# Altium PCB Switch Video con PIC.PCBDOC
Units mm, origin at the board's own origin, x right, y up, seen from the top; angles counter-clockwise.
Board outline 1575.25 x 975.75 mm, 2 copper layers (Top Layer, Bottom Layer); 138 components, 95 nets, 424 pads, 8 vias.
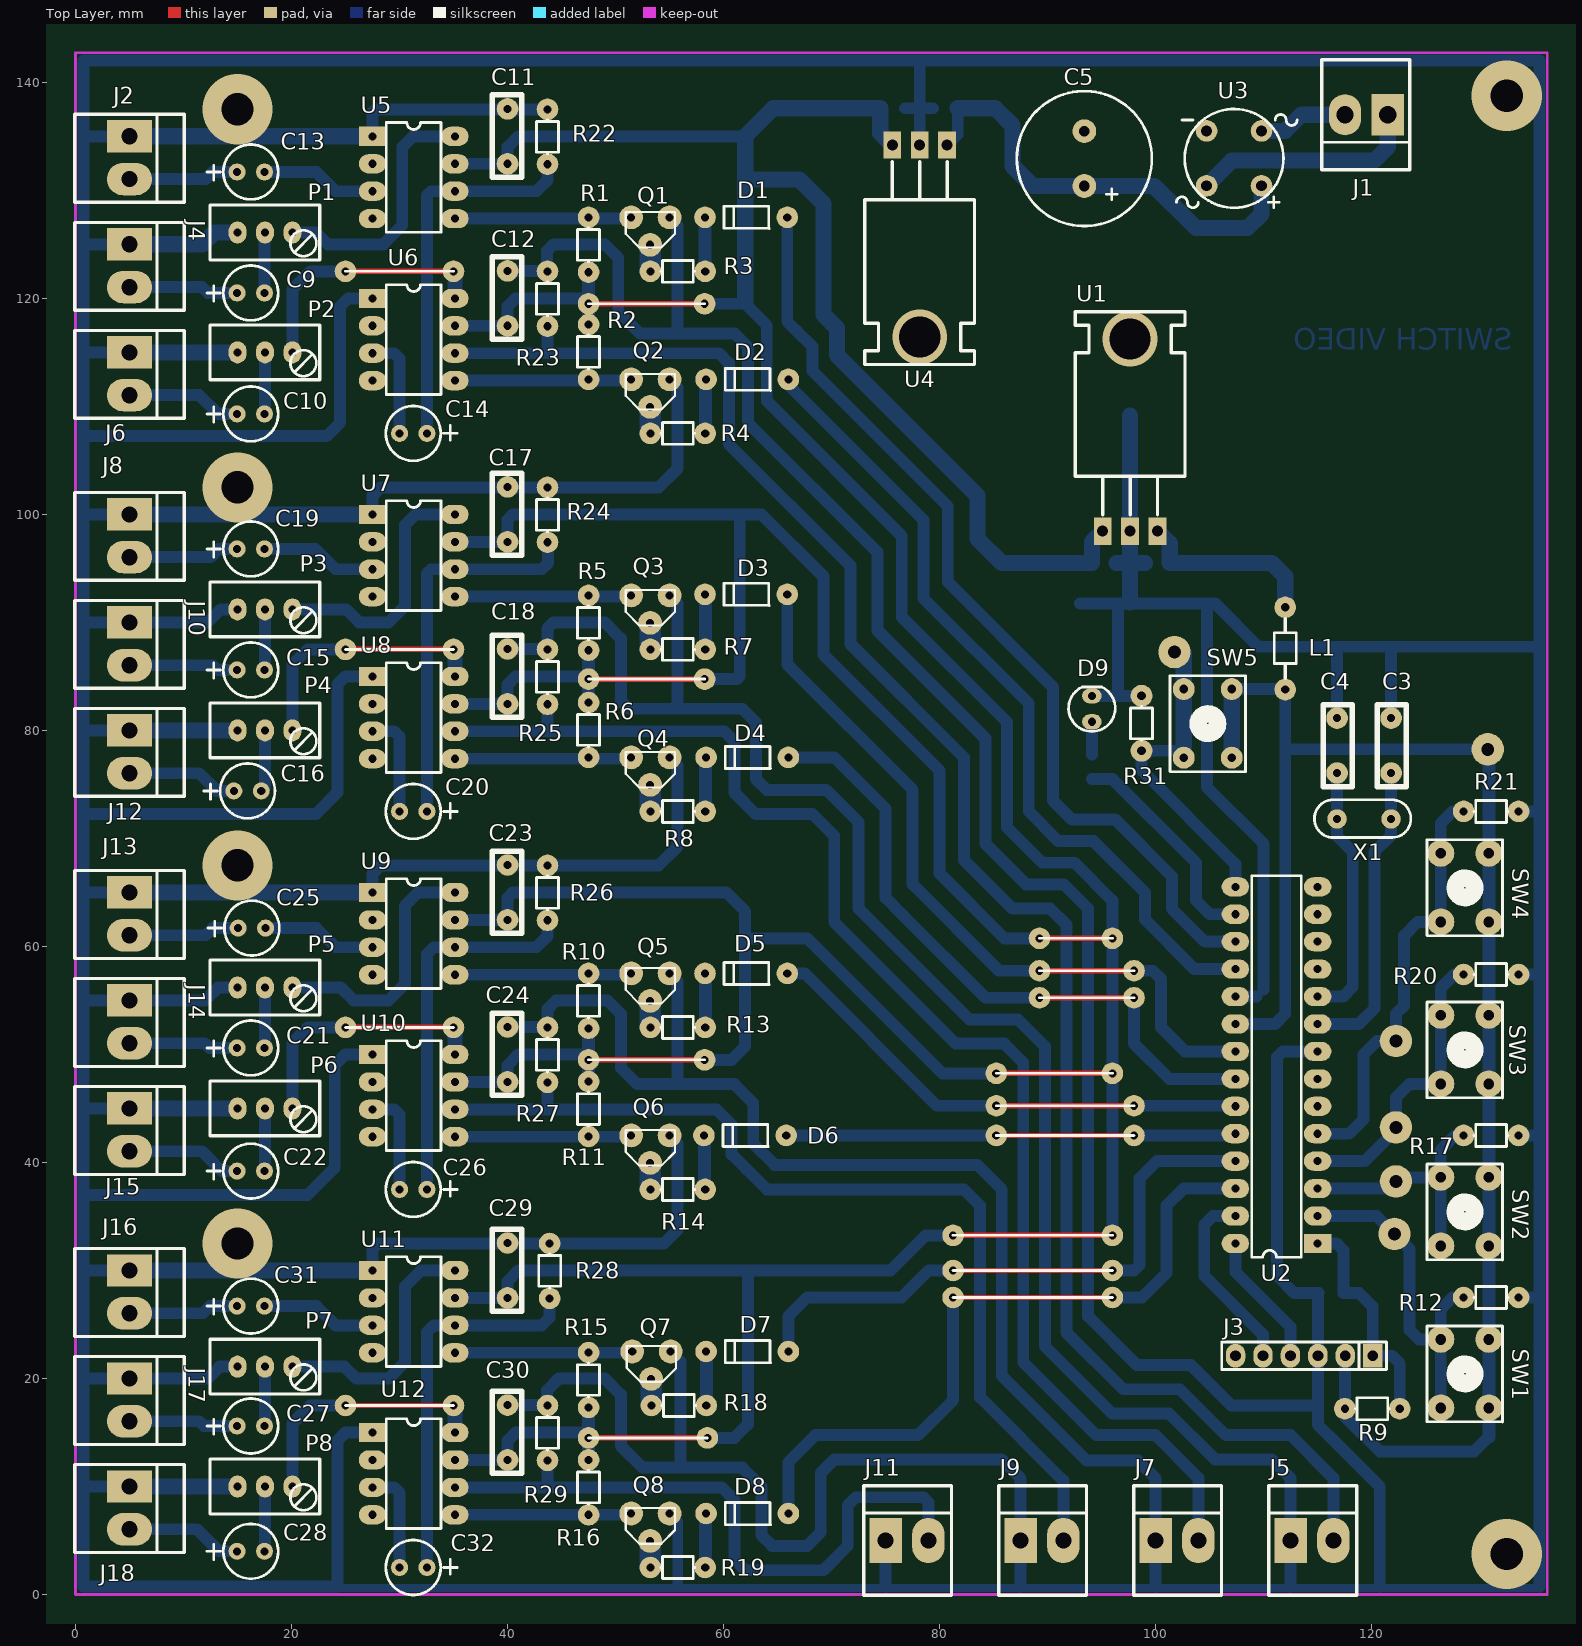
[diagram p0: Top Layer view]
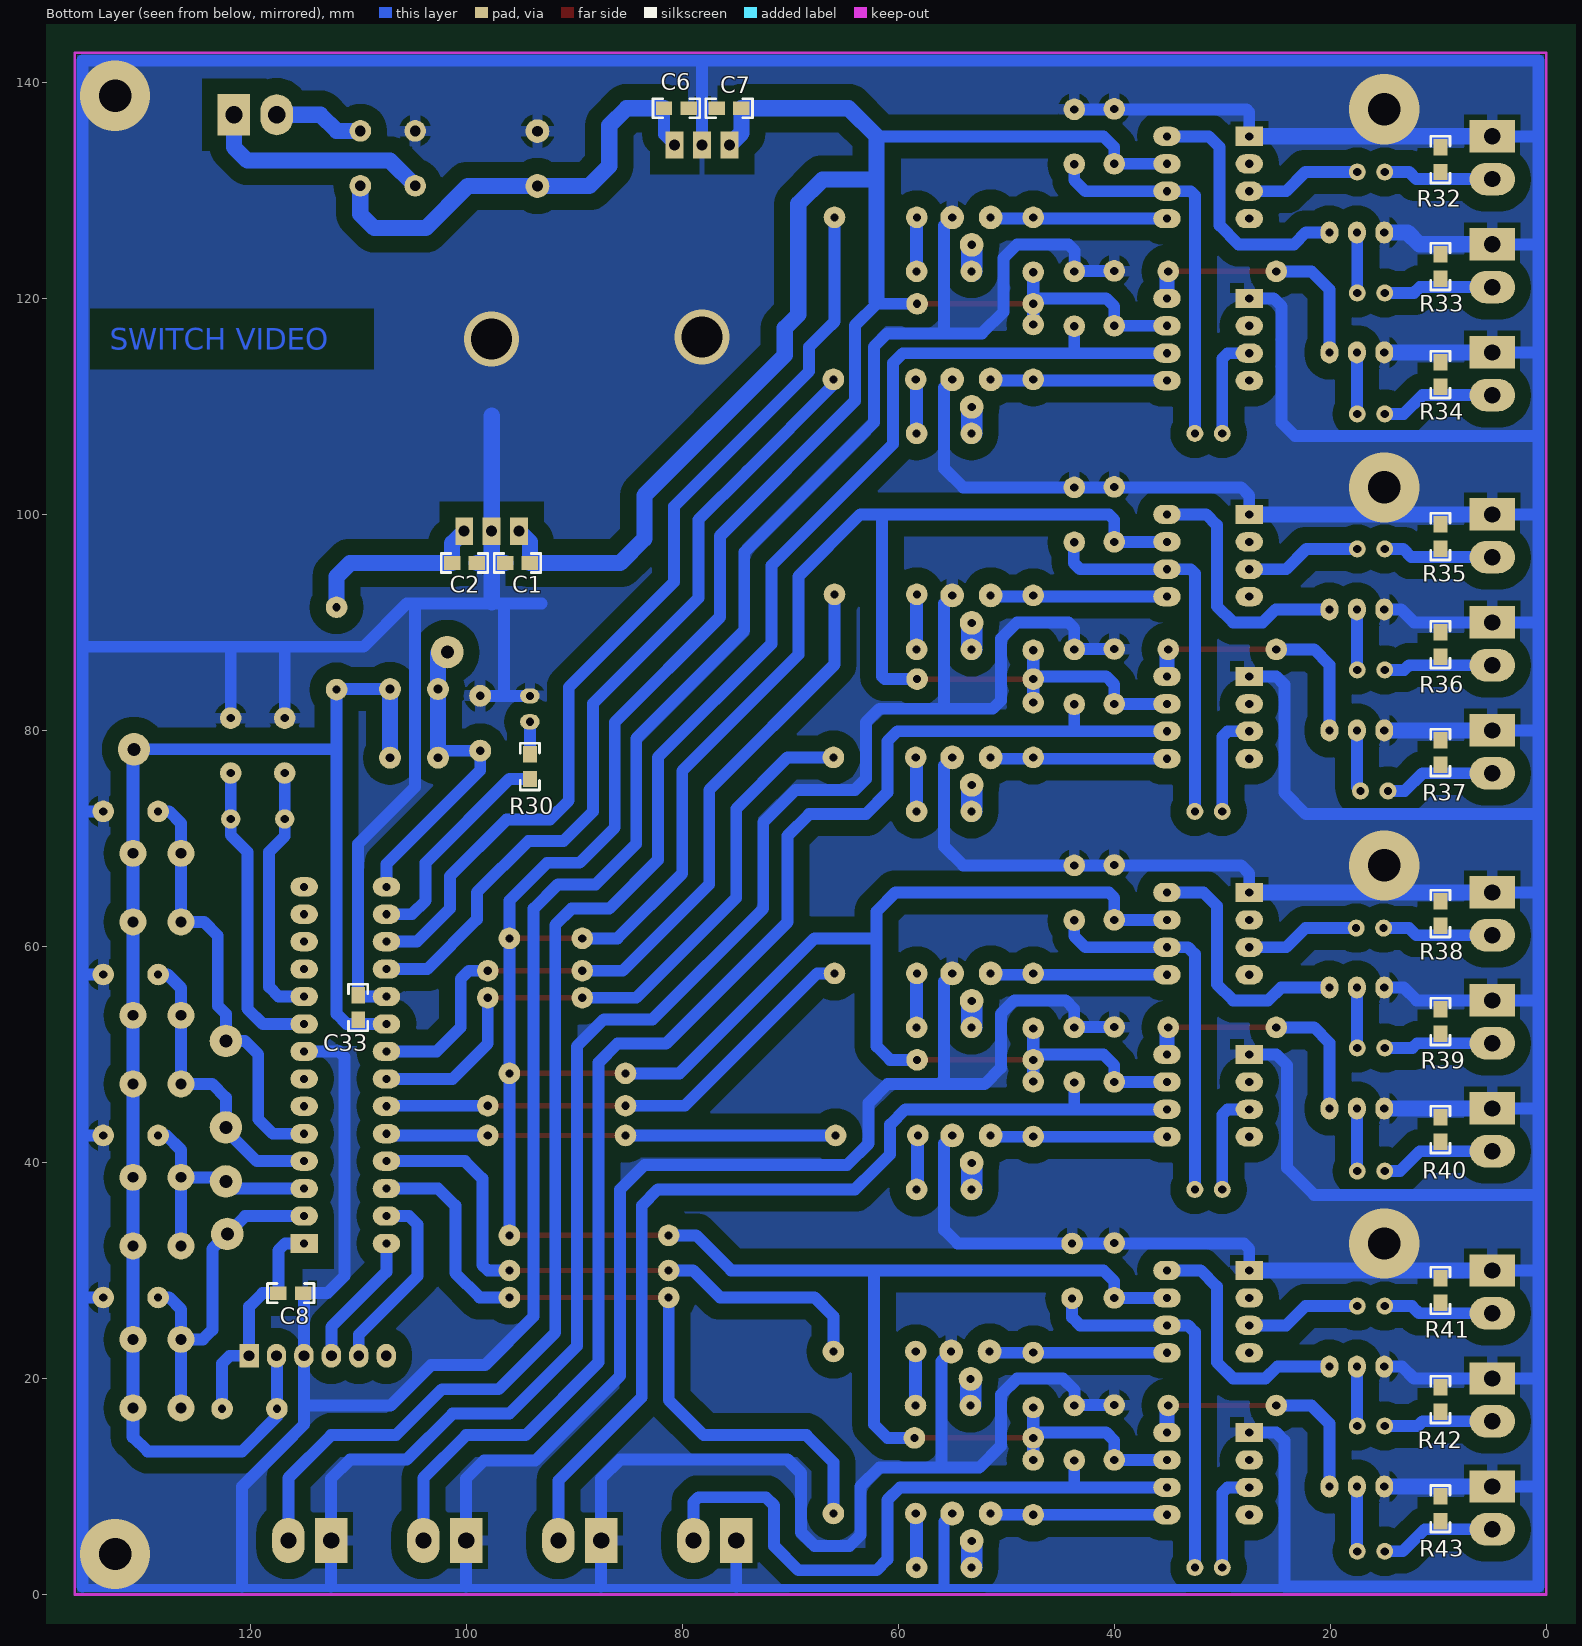
[diagram p1: Bottom Layer view, seen from below]

## Layer stack, top to bottom
Top Layer: signal copper 0.0356
Dielectric: dielectric 0.32, FR-4, Dk 4.8
Bottom Layer: signal copper 0.0356

## Board outline
-268.75,-471.25 -268.75,504.5 1306.5,504.5 1306.5,-469.75 -268.75,-469.75

## Design rules (kind name [scope] priority, off if disabled: settings)
Clearance GND [InNet('GND') vs InNet('GND')] p1: gap=0.5
Clearance KEEP [OnLayer('Keep-Out Layer')] p2: gap=0.1
Clearance [All] p3: gap=1.5
ComponentClearance [All] p1: gap=0.254 collisioncheckmode=3 verticalgap=0.254
PolygonConnect [All] p1: connectstyle=Relief reliefconductorwidth=1 reliefentries=4 polygonreliefangle="90 Angle"
RoutingVias [All] p1: holewidth=0.711 width=1.27 viastyle="Through Hole" minholewidth=0.711 minwidth=1.27 maxholewidth=0.711 maxwidth=1.27
SolderMaskExpansion [All] p1: expansion=0.102
TestPointUsage [All] p1: valid=0 allowmultiple=FALSE
Testpoint [All] p1: side=15 testpointundercomponent=TRUE minsize=1.016 maxsize=2.54 preferedsize=1.524 minholesize=0 maxholesize=1.016 preferedholesize=0.813 testpointgrid=0.025 style=1023 order=0-112345678
Width [All] p1: maxlimit=4 minlimit=0.254 preferedwidth=0.5 bottomlayer_prefwidth=1.1 minimp=50.000000 maximp=50.000000 favimp=50.000000
17 further rules are at their usual default settings.

## Classes and differential pairs
component class "Switch Video con PIC": C5 C6 C7 C9 C10 C11 C12 C13 C14 C15 C16 C17 C18 C19 C20 C21 C22 C23 C24 C25 C26 C27 C28 C29 C30 C31 C32 J1 J2 J4 J5 J6 J7 J8 J9 J10 J11 J12 J13 J14 J15 J16 J17 J18 P1 P2 P3 P4 P5 P6 P7 P8 R22 R23 R24 R25 R26 R27 R28 R29 R32 R33 R34 R35 R36 R37 R38 R39 R40 R41 R42 R43 U3 U4 U5 U6 U7 U8 U9 U10 U11 U12
component class "Modulo control": C1 C2 C3 C4 C8 C33 D1 D2 D3 D4 D5 D6 D7 D8 D9 J3 L1 Q1 Q2 Q3 Q4 Q5 Q6 Q7 Q8 R1 R2 R3 R4 R5 R6 R7 R8 R9 R10 R11 R12 R13 R14 R15 R16 R17 R18 R19 R20 R21 R30 R31 SW1 SW2 SW3 SW4 SW5 U1 U2 X1

## Components (designator, comment, footprint, x,y, rotation, side; value= is the part's Value field where it differs from the comment)
C1 "100nF" 0805 94.1,95.5 r0 bottom locked
C2 "100nF" 0805 101.3,95.5 r180 bottom locked
C3 "22p" CAP5.08 121.8,78.6 r270 top locked
C4 "22p" CAP5.08 116.8,78.6 r270 top locked
C5 "1000uF25V" "CE 5.0/12.5" 93.4,130.4 r270 top locked
C6 "100nF" 0805 79.4,137.6 r0 bottom locked
C7 "100nF" 0805 76.8,137.6 r180 bottom locked
C8 "100nF" 0805 115.1,27.9 r0 bottom locked
C9 "4.7uF50V" "CE 2.5/5.0" 17.5,120.5 r180 top locked
C10 "4.7uF50V" "CE 2.5/5.0" 17.5,109.3 r180 top locked
C11 "100nF" CAP5.08 40,135 r90 top locked
C12 "100nF" CAP5.08 40,120 r90 top locked
C13 "4.7uF50V" "CE 2.5/5.0" 17.5,131.7 r180 top locked
C14 "4.7uF50V" "CE 2.5/5.0" 30,107.5 r0 top locked
C15 "4.7uF50V" "CE 2.5/5.0" 17.5,85.6 r180 top locked
C16 "4.7uF50V" "CE 2.5/5.0" 17.2,74.4 r180 top locked
C17 "100nF" CAP5.08 40,100 r90 top locked
C18 "100nF" CAP5.08 40,85 r90 top locked
C19 "4.7uF50V" "CE 2.5/5.0" 17.5,96.8 r180 top locked
C20 "4.7uF50V" "CE 2.5/5.0" 30,72.5 r0 top locked
C21 "4.7uF50V" "CE 2.5/5.0" 17.5,50.6 r180 top locked
C22 "4.7uF50V" "CE 2.5/5.0" 17.5,39.2 r180 top locked
C23 "100nF" CAP5.08 40,65 r90 top locked
C24 "100nF" CAP5.08 40,50 r90 top locked
C25 "4.7uF50V" "CE 2.5/5.0" 17.6,61.7 r180 top locked
C26 "4.7uF50V" "CE 2.5/5.0" 30,37.5 r0 top locked
C27 "4.7uF50V" "CE 2.5/5.0" 17.5,15.6 r180 top locked
C28 "4.7uF50V" "CE 2.5/5.0" 17.5,4 r180 top locked
C29 "100nF" CAP5.08 40,30 r90 top locked
C30 "100nF" CAP5.08 40,15 r90 top locked
C31 "4.7uF50V" "CE 2.5/5.0" 17.5,26.7 r180 top locked
C32 "4.7uF50V" "CE 2.5/5.0" 30,2.5 r0 top locked
C33 "100nF" 0805 110,53.2 r90 bottom locked
D1 "1N4148 DO-35" DO-35_300 65.9,127.5 r180 top locked
D2 "1N4148 DO-35" DO-35_300 66,112.5 r180 top locked
D3 "1N4148 DO-35" DO-35_300 65.9,92.6 r180 top locked
D4 "1N4148 DO-35" DO-35_300 66,77.5 r180 top locked
D5 "1N4148 DO-35" DO-35_300 65.9,57.5 r180 top locked
D6 "1N4148 DO-35" DO-35_300 65.8,42.5 r180 top locked
D7 "1N4148 DO-35" DO-35_300 66,22.5 r180 top locked
D8 "1N4148 DO-35" DO-35_300 66,7.5 r180 top locked
D9 "LED" "LED 3MM" 94.1,83.2 r90 top locked
J1 "PW2S" PW2S#1 121.5,137 r180 top locked
J2 "PW2S" PW2S#2 5,135 r270 top locked
J3 "HEADER6" JUMPER_6A 120.1,22.1 r180 top locked
J4 "PW2S" PW2S#2 5,125 r270 top locked
J5 "PW2S" PW2S#2 112.5,5 r0 top locked
J6 "PW2S" PW2S#2 5,115 r270 top locked
J7 "PW2S" PW2S#2 100,5 r0 top locked
J8 "PW2S" PW2S#2 5,100 r270 top locked
J9 "PW2S" PW2S#2 87.5,5 r0 top locked
J10 "PW2S" PW2S#2 5,90 r270 top locked
J11 "PW2S" PW2S#2 75,5 r0 top locked
J12 "PW2S" PW2S#2 5,80 r270 top locked
J13 "PW2S" PW2S#2 5,65 r270 top locked
J14 "PW2S" PW2S#2 5,55 r270 top locked
J15 "PW2S" PW2S#2 5,45 r270 top locked
J16 "PW2S" PW2S#2 5,30 r270 top locked
J17 "PW2S" PW2S#2 5,20 r270 top locked
J18 "PW2S" PW2S#2 5,10 r270 top locked
L1 "CCF06" AXIAL10X4_300 112,91.4 r270 top locked
P1 "2K" BOURNS3296W 15,126.1 r0 top locked
P2 "2K" BOURNS3296W 15,115 r0 top locked
P3 "2K" BOURNS3296W 15,91.2 r0 top locked
P4 "2K" BOURNS3296W 15,80 r0 top locked
P5 "2K" BOURNS3296W 15,56.2 r0 top locked
P6 "2K" BOURNS3296W 15,45 r0 top locked
P7 "2K" BOURNS3296W 15,21.1 r0 top locked
P8 "2K" BOURNS3296W 15,10 r0 top locked
Q1 "PN2222" TO-92C 55,127.5 r0 top locked
Q2 "PN2222" TO-92C 55,112.5 r0 top locked
Q3 "PN2222" TO-92C 55,92.5 r0 top locked
Q4 "PN2222" TO-92C 55,77.5 r0 top locked
Q5 "PN2222" TO-92C 55,57.5 r0 top locked
Q6 "PN2222" TO-92C 55,42.5 r0 top locked
Q7 "PN2222" TO-92C 55.1,22.5 r0 top locked
Q8 "PN2222" TO-92C 55,7.5 r0 top locked
R1 "10K" RES_MF1/2W_200#1 47.5,127.5 r270 top locked
R2 "10K" RES_MF1/2W_200#1 47.5,112.5 r90 top locked
R3 "2K7" RES_MF1/2W_200#1 58.3,122.5 r180 top locked
R4 "2K7" RES_MF1/2W_200#1 58.3,107.5 r180 top locked
R5 "10K" RES_MF1/2W_200#1 47.5,92.5 r270 top locked
R6 "10K" RES_MF1/2W_200#1 47.5,77.5 r90 top locked
R7 "2K7" RES_MF1/2W_200#1 58.3,87.5 r180 top locked
R8 "2K7" RES_MF1/2W_200#1 58.3,72.5 r180 top locked
R9 "4K7" RES_MF1/2W_200#1 122.6,17.2 r180 top locked
R10 "10K" RES_MF1/2W_200#1 47.5,57.5 r270 top locked
R11 "10K" RES_MF1/2W_200#1 47.5,42.4 r90 top locked
R12 "10K" RES_MF1/2W_200#1 133.6,27.5 r180 top locked
R13 "2K7" RES_MF1/2W_200#1 58.3,52.5 r180 top locked
R14 "2K7" RES_MF1/2W_200#1 58.3,37.5 r180 top locked
R15 "10K" RES_MF1/2W_200#1 47.5,22.4 r270 top locked
R16 "10K" RES_MF1/2W_200#1 47.5,7.38 r90 top locked
R17 "10K" RES_MF1/2W_200#1 133.6,42.5 r180 top locked
R18 "2K7" RES_MF1/2W_200#1 58.4,17.5 r180 top locked
R19 "2K7" RES_MF1/2W_200#1 58.3,2.5 r180 top locked
R20 "10K" RES_MF1/2W_200#1 133.6,57.4 r180 top locked
R21 "10K" RES_MF1/2W_200#1 133.6,72.5 r180 top locked
R22 "680" RES_MF1/2W_200#1 43.7,137.5 r270 top locked
R23 "680" RES_MF1/2W_200#1 43.7,122.5 r270 top locked
R24 "680" RES_MF1/2W_200#1 43.7,102.5 r270 top locked
R25 "680" RES_MF1/2W_200#1 43.7,87.5 r270 top locked
R26 "680" RES_MF1/2W_200#1 43.7,67.5 r270 top locked
R27 "680" RES_MF1/2W_200#1 43.7,52.5 r270 top locked
R28 "680" RES_MF1/2W_200#1 43.9,32.5 r270 top locked
R29 "680" RES_MF1/2W_200#1 43.7,17.5 r270 top locked
R30 "220" 0805 94.1,75.5 r90 bottom locked
R31 "10K" RES_MF1/2W_200#2 98.7,83.2 r270 top locked
R32 "82" 0805 9.8,131.7 r90 bottom locked
R33 "82" 0805 9.8,121.8 r90 bottom locked
R34 "82" 0805 9.8,111.8 r90 bottom locked
R35 "82" 0805 9.8,96.8 r90 bottom locked
R36 "82" 0805 9.8,86.8 r90 bottom locked
R37 "82" 0805 9.8,76.8 r90 bottom locked
R38 "82" 0805 9.8,61.9 r90 bottom locked
R39 "82" 0805 9.8,51.9 r90 bottom locked
R40 "82" 0805 9.8,41.9 r90 bottom locked
R41 "82" 0805 9.8,27 r90 bottom locked
R42 "82" 0805 9.8,16.9 r90 bottom locked
R43 "82" 0805 9.8,6.8 r90 bottom locked
SW1 "TACT SWITCH" "PULSADOR 6X6"#1 125,25 r270 top locked
SW2 "TACT SWITCH" "PULSADOR 6X6"#1 125,40 r270 top locked
SW3 "TACT SWITCH" "PULSADOR 6X6"#1 125,55 r270 top locked
SW4 "TACT SWITCH" "PULSADOR 6X6"#1 125,70 r270 top locked
SW5 "TACT SWITCH" "PULSADOR 6X6"#2 101.2,85.2 r270 top locked
U1 "LM7805T" TO-220_1 95.1,98.45 r0 top locked
U2 "PIC16F873A" DIP28F 115,32.5 r180 top locked
U3 "W10M" CASE22 109.8,135.5 r0 top locked
U4 "LM7809T" TO-220_1 80.7,134.2 r180 top locked
U5 "TEA2014A" DIP8 27.5,135 r0 top locked
U6 "TEA2014A" DIP8 27.5,120 r0 top locked
U7 "TEA2014A" DIP8 27.5,100 r0 top locked
U8 "TEA2014A" DIP8 27.5,85 r0 top locked
U9 "TEA2014A" DIP8 27.5,65 r0 top locked
U10 "TEA2014A" DIP8 27.5,50 r0 top locked
U11 "TEA2014A" DIP8 27.5,30 r0 top locked
U12 "TEA2014A" DIP8 27.5,15 r0 top locked
X1 "XL20M-UM5" UM5 116.8,71.8 r0 top locked

## Footprints (in the part's own frame and the unit in brackets; to place one, negate y for a bottom-side part, rotate by r counter-clockwise, add the part's x,y. Pads: shape width x height; smd on the part's side, far side on the other; paste and mask are expansions set on the pad)
0805 [mil]
  rect 60x50 smd: 1(0,0) 2(90,0)
  silkscreen extent -40,-35 130,35
AXIAL10X4_300 [mm]
  round 2 hole 0.75: 1(0,0) 2(7.62,0)
  silkscreen extent 1.04,-1.01 6.58,1.02
BOURNS3296W [mil]
  oval 65x80 hole 29.53: 1(0,0) 2(100,0) 3(200,0)
  silkscreen extent -100,-100 300,100
CAP5.08 [mm] "CAPACITOR AXIAL 5.08"
  round 2 hole 0.75: 1(-2.54,0) 2(2.54,0)
  silkscreen extent -3.77,-1.3 3.83,1.4
CASE22 [mm]
  round 2 hole 1: 1(0,-5.08) 2(0,0) 3(-5.08,0) 4(-5.08,-5.08)
  silkscreen extent -7.87,-7.11 3.3,2.03
"CE 2.5/5.0" [mil]
  round 62 hole 29.53: 1(100,0) 2(0,0)
  silkscreen extent -50,-100 210,100
"CE 5.0/12.5" [mm]
  round 2.2 hole 1: 1(0,0) 2(-5.08,0)
  silkscreen extent -8.79,-6.25 3.71,6.25
DIP8 [mm]
  rect 2.54x1.778 hole 0.75: 1(0,0)
  oval 2.54x1.778 hole 0.75: 2(0,-2.54) 3(0,-5.08) 4(0,-7.62) 5(7.62,-7.62) 6(7.62,-5.08) 7(7.62,-2.54) 8(7.62,0)
  silkscreen extent 1.27,-8.89 6.35,1.27
DIP28F [mm]
  rect 2.54x1.778 hole 0.75: 1(0,0)
  oval 2.54x1.778 hole 0.75: 2(0,-2.54) 3(0,-5.08) 4(0,-7.62) 5(0,-10.16) 6(0,-12.7) 7(0,-15.24) 8(0,-17.78) 9(0,-20.32) 10(0,-22.86) 11(0,-25.4) 12(0,-27.94) 13(0,-30.48) 14(0,-33.02) 15(7.62,-33.02) 16(7.62,-30.48) 17(7.62,-27.94) 18(7.62,-25.4) 19(7.62,-22.86) 20(7.62,-20.32) 21(7.62,-17.78) 22(7.62,-15.24) 23(7.62,-12.7) 24(7.62,-10.16) 25(7.62,-7.62) 26(7.62,-5.08) 27(7.62,-2.54) 28(7.62,0)
  silkscreen extent 1.52,-34.04 6.1,1.27
DO-35_300 [mm]
  round 2 hole 0.75: A(0,0) K(7.62,0)
  silkscreen extent 1.66,-1.02 5.85,1.03
JUMPER_6A [mm]
  rect 1.8x2.2 hole 1: 1(0,0)
  oval 1.8x2.2 hole 1: 2(2.54,0) 3(5.08,0) 4(7.62,0) 5(10.16,0) 6(12.7,0)
  silkscreen extent -1.27,-1.27 13.97,1.27
"LED 3MM" [mm]
  oval 1.4x1.8 hole 0.75: A(-2.4,0) K(0,0)
  silkscreen extent -3.3,-2.16 0.82,2.16
"PULSADOR 6X6"#1 [mm]
  round 2.5 hole 1: 1(7.728,5.848) 2(7.728,1.403) 3(1.378,5.848) 4(1.378,1.403)
  silkscreen extent 0.13,0.13 9.02,7.12
"PULSADOR 6X6"#2 [mm]
  round 2.032 hole 0.813: 1(7.728,5.848) 2(7.728,1.403) 3(1.378,5.848) 4(1.378,1.403)
  silkscreen extent 0.13,0.13 9.02,7.12
PW2S#1 [mm]
  rect 3x3.8 hole 1.6: 1(0,0)
  oval 3x3.8 hole 1.6: 2(3.962,0)
  silkscreen extent -2.03,-5.08 6.11,5.08
PW2S#2 [mm]
  rect 3x4.2 hole 1.5: 1(0,0)
  oval 3x4.2 hole 1.5: 2(3.962,0)
  silkscreen extent -2.03,-5.08 6.11,5.08
RES_MF1/2W_200#1 [mm]
  round 2 hole 0.75: 1(0,0) 2(5.08,0)
  silkscreen extent 0.97,-1.02 4.11,1.02
RES_MF1/2W_200#2 [mm]
  round 2.032 hole 0.813: 1(0,0) 2(5.08,0)
  silkscreen extent 0.97,-1.02 4.11,1.02
TO-92C [mm]
  round 2.2 hole 0.75: 1(0,0) 2(-1.803,-2.54) 3(-3.556,0)
  silkscreen extent -4.06,-2.79 0.51,0.51
TO-220_1 [mil]
  rect 65x100 hole 40: 1(0,0) 2(100,0) 3(200,0)
  silkscreen extent -100,60 300,800
UM5 [mm] "UM-5"
  round 1.8 hole 0.762: 1(0,0) 2(5,0)
  silkscreen extent -2.1,-1.72 6.83,1.78

## Part data
C1 C2 C6 C7 C11 C12 C17 C18 C23 C24 C29 C30: library part 100n, "CAPACITOR CERAMICO DISCO 2.54 mm  X7R  50V  100nF"
C3 C4: "CAPACITOR PLATE NP0 100V PASO 2.54 mm 22 pF"
C5: library part "1000uF25V HFC", "CAPACITOR ELECTROLITICO RADIAL  HFC EPCOS 12.5 X 20 mm PASO 5 mm +/-20% 105ºC 25V 1000uF"
C8 C33: library part 100n, "CAPACITOR SMD 0805 X7R  50 V 100 nF"
C9 C10 C13 C14 C15 C16 C19 C20 C21 C22 C25 C26 C27 C28 C31 C32: library part 4n7F2KV, "CAPACITOR CERAMICO DISCO 5.08 mm  Z5U  2KV  4n7F +20%"
D1 D2 D3 D4 D5 D6 D7 D8: "1N4148 DO-35 DIODO"
D9: library part "LED AMARILLO 3MM", "LED AMARILLO 3MM"
J1 J2 J4 J5 J6 J7 J8 J9 J10 J11 J12 J13 J14 J15 J16 J17 J18: "PW2S HEADER .156\" RECTO 2 VIAS"
J3: "TIRA MOLEX 1X6 11MM MACHO RECTA PARA PCB"
L1: "INDUCTOR CCF06"
P1 P2 P3 P4 P5 P6 P7 P8: library part "BOURNS 3296W 202", "TRIMPOT BOURNS 3296W 2 KILOHMS"
Q1 Q2 Q3 Q4 Q5 Q6 Q7 Q8: "PN2222 TO-92 NPN TRANSISTOR"
R1 R2 R5 R6 R10 R11 R12 R15 R16 R17 R20 R21 R31: "RESISTOR METAL FILM 0.5 W 5% 10 KILOHMS"
R3 R4 R7 R8 R13 R14 R18 R19: "RESISTOR METAL FILM 0.5 W 5% 2.7 KILOHMS"
R9: "RESISTOR METAL FILM 0.5 W 5% 4.7 KILOHMS"
R22 R23 R24 R25 R26 R27 R28 R29: "RESISTOR METAL FILM 0.5 W 5% 680 OHMS"
R30: "RESISTOR SMD0805 0.125 W 5%  220 OHMS"
R32 R33 R34 R35 R36 R37 R38 R39 R40 R41 R42 R43: "RESISTOR SMD0805 0.125 W 5%  82 OHMS"
SW1 SW2 SW3 SW4 SW5: library part SW-PB, "TACT SWITCH 6X6X12MM 4PINES TSWTS065"
U1: "LM7805T TO-220 CIRC INT"
U2: library part PIC-16F873A, "PIC-16F873A - I/SP DIP28 7.62 MM"
U3: "W10M CASE22 CIRC INT RECTIFICADOR PUENTE 1000V 1A"
U4: "LM7809T TO-220 CIRC INT"
U5 U6 U7 U8 U9 U10 U11 U12: "TEA2014A DIP-8 VIDEO SWITCH"
X1: "XL20M-UM5 CRISTAL DE 20 MHZ 10ppm"

## Free pads (board coordinates)
  round 2 hole 0.75: 0(35,17.5) 0(89.25,57.75) 1(25,17.5) 1(89.25,55.25) 2(35,52.5) 2(85.25,42.5) 3(25,52.5) 3(85.25,45.25) 4(25,87.5) 4(81.25,27.5) 5(35,87.5) 5(81.25,30) 6(25,122.5) 6(47.5,84.75) 7(35,122.5) 7(58.25,84.75) 8(47.5,49.5) 9(58.25,49.5) 10(47.5,14.5) 11(58.5,14.5) 12(47.5,119.5) 13(58.25,119.5) 14(81.25,33.25) 15(96,27.5) 16(96,30) 17(96,33.25) 18(98,42.5) 19(98,45.25) 20(98,55.25) 21(98,57.75) 22(85.25,48.25) 23(96,48.25) 24(89.25,60.75) 25(96,60.75)
  round 3 hole 1.2: 0(101.75,87.25) 0(122.118,33.382) 0(122.25,38.25) 0(122.25,43.25) 0(122.25,51.25) 0(130.75,78.25)

## Via types
v1: diameter 6.5, hole 3, Top Layer to Bottom Layer, 6 vias
v2: diameter 5.08, hole 3.81, Top Layer to Bottom Layer, 2 vias

## Nets (pads, with @x,y where several pads share a name; then routed paths per layer and width w, separated by ;. In a path a pad name is that pad's centre, name@x,y a point inside that pad or via, vN(x,y) a via of type N, cw(c..) or ccw(c..) an arc to the next point about the centre after c; other vN are vias at no path point)
+5V: C33.1 J3.2 L1.2 pad.0@130.75,78.25 R9.2 SW1.1 SW1.3 SW2.1 SW2.3 SW3.1 SW3.3 SW4.1 SW4.3 SW5.1 SW5.3 U2.20 | length 149.6
  Bottom Layer w1.1: SW5.3 L1.2@111.958,83.822 ; U2.20 111.07,52.82 112,53.75 L1.2 ; 112,78.25 pad.0@130.75,78.25 ; J3.2@117.52,22.23 117.52,16.48 120.75,13.25 129.5,13.25 130.848,14.598
  Bottom Layer w1.2: 130.848,14.598 pad.0@130.848,78.152
  Bottom Layer w1.5: SW5.1 SW5.3
AUTO: pad.0@101.75,87.25 R31.2 SW5.2 SW5.4 U2.15 | length 29.7
  Bottom Layer w1.1: SW5.2@102.483,78.12 R31.2 98.7,76.3 107.38,67.62 U2.15
  Bottom Layer w1.5: SW5.2 pad.0@102.603,87.147
GND: C1.2 C2.2 C3.1 C4.1 C5.2 C6.1 C7.1 C8.1 C11.2 C12.2 C17.2 C18.2 C23.2 C24.2 C29.2 C30.2 C33.2 D9.K J2.1 J3.3 J4.1 J5.1 J6.1 J7.1 J8.1 J9.1 J10.1 J11.1 J12.1 J13.1 J14.1 J15.1 J16.1 J17.1 J18.1 P1.1 P2.1 P3.1 P4.1 P5.1 P6.1 P7.1 P8.1 Q1.1 Q2.1 Q3.1 Q4.1 Q5.1 Q6.1 Q7.1 Q8.1 R12.1 R17.1 R20.1 R21.1 R22.1 R23.1 R24.1 R25.1 R26.1 R27.1 R28.1 R29.1 R31.1 R32.2 R33.2 R34.2 R35.2 R36.2 R37.2 R38.2 R39.2 R40.2 R41.2 R42.2 R43.2 U1.2 U2.8 U2.19 U3.3 U4.2 U5.1 U6.1 U7.1 U8.1 U9.1 U10.1 U11.1 U12.1 | length 1801.1
  Bottom Layer w0.75: 18.648,0.602 135.648,0.602
  Bottom Layer w1: Q8.1 55.75,6.75 55.75,0.75
  Bottom Layer w1.1: 0.727,10 J18.1 ; 0.727,20 12.25,20 13.35,21.1 P7.1 ; 0.727,30 J16.1 ; 0.727,37 21.5,37 24,39.5 24,49 25,50 U10.1 ; 0.727,45 J15.1 ; 0.727,55 12,55 13.2,56.2 P5.1 ; 0.727,65 J13.1 ; 0.727,72.25 22.25,72.25 24.25,74.25 24.25,84.25 25,85 U8.1 ; 0.727,80 J12.1 ; 0.727,90 12.25,90 13.45,91.2 P3.1 ; 0.727,100 J8.1 ; 0.727,115 J6.1 ; 0.727,125 J4.1 ; 0.727,135 J2.1 ; 0.75,107.25 23.25,107.25 24.5,108.5 24.5,119.25 25.25,120 U6.1 ; U12.1 25,15 24.25,14.25 24.25,0.727 0.727,0.727 0.727,142.023 135.523,142.023 135.523,0.727 ; U11.1 27.5,32 28,32.5 R28.1@43.75,32.5 ; U9.1 27.5,66.75 28.25,67.5 54,67.5 55.75,69.25 55.75,76.75 Q4.1 ; U7.1 27.5,101.75 28.25,102.5 54,102.5 55.75,104.25 55.75,111.75 Q2.1 ; U5.1 27.5,137.25 27.75,137.5 R22.1@43.75,137.5 ; C30.2 43.66,17.54 43.66,18.91 44.75,20 49,20 50.5,18.5 50.5,13.75 52.5,11.75 61.75,11.75 63.5,10 63.5,5.5 64.5,4.5 67.75,4.5 69,5.75 69,11.25 70.25,12.5 85.75,12.5 87.5,10.75 87.5,0.727 ; C24.2 R27.1@43.66,52.54 ; C18.2 R25.1@43.66,87.54 ; C12.2 43.66,122.54 43.66,124.41 44.25,125 49,125 50.25,123.75 50.25,118.75 52.25,116.75 61,116.75 62.25,115.5 62.25,108.5 74.25,96.5 74.25,89.25 84.25,79.25 84.25,69.5 88,65.75 91.5,65.75 93.75,63.5 93.75,25.75 98.25,21.25 103.25,21.25 107,17.5 115.02,17.5 ; R27.1 43.7,54.2 44.5,55 49.25,55 50.5,53.75 50.5,48.75 52,47.25 61,47.25 62.75,45.5 62.75,41.75 64.726,39.774 83.476,39.774 85.75,37.5 85.75,20.25 93.608,12.392 98.358,12.392 100,10.75 100,0.727 ; R25.1 43.7,89.45 44.25,90 49,90 50.5,88.5 50.5,82.75 51.25,82 61.75,82 63,80.75 63,75.5 64,74.5 69.5,74.5 72.5,71.5 72.5,63.5 82.75,53.25 87.25,53.25 89.75,50.75 89.75,23 96,16.75 101.25,16.75 105.5,12.5 110.75,12.5 112.5,10.75 112.5,0.727 ; R28.1 54.5,32.5 55.75,33.75 55.75,41.75 Q6.1 ; Q5.1 55.75,56.75 55.75,47.25 ; Q3.1 55.75,91.75 55.75,82 ; Q1.1 55.75,126.75 55.75,116.75 ; Q7.1 56,21.6 56,11.75 ; 75,0.727 J11.1 ; C7.1 C6.1 ; U4.2 78.16,141.933 ; 93,91.75 105.5,91.75 109.5,87.75 135.523,87.75 ; D9.K R31.1 ; 96.5,83.2 96.5,91.5 ; 104.75,91.75 104.75,74.75 110,69.5 C33.2@110,56 ; U2.19 109.36,55.36 ; U2.8 111.78,50.28 111.25,49.75 111.25,29.5 112.85,27.9 C8.1 ; C8.1@115.02,27.82 115.02,15.73 116.91,13.84 120.75,10 120.75,0.727 ; C4.1 116.8,87.7 ; C3.1 121.8,87.7 ; R12.1 135.523,27.5 ; R17.1 135.523,42.5 ; R20.1 135.523,57.4 ; R21.1 135.523,72.5
  Bottom Layer w1.5: J6.1@4.75,115 P2.1 ; J2.1@4.75,135 U5.1 ; J18.1 P8.1 ; J16.1 U11.1 ; J15.1 P6.1 ; J13.1 U9.1 ; J12.1 P4.1 ; J8.1 U7.1 ; J4.1 11.75,125 12.85,126.1 P1.1 ; C1.2 C2.2 ; 97.64,91.86 97.64,109.14
  other v1: 132.5,3.75 15,32.5 15,67.5 15,102.5 15,137.5 132.5,138.75
  other v2: 97.64,116.23 78.16,116.42
IMAGEN_1: pad.0@122.118,33.382 R12.2 SW1.2 SW1.4 U2.2 | length 32.4
  Bottom Layer w1.1: U2.2 120.46,35.04 123.5,32 123.5,24.5 124.378,23.622 SW1.4 ; SW1.2@126.403,17.097 126.403,26.403 127.5,27.5 R12.2
IMAGEN_2: pad.0@122.25,38.25 R17.2 SW2.2 SW2.4 U2.3 | length 23.4
  Bottom Layer w1.1: U2.3 121.58,37.58 122.622,38.622 SW2.4 ; SW2.2 126.403,41.153 127.75,42.5 R17.2
IMAGEN_3: pad.0@122.25,43.25 R20.2 SW3.2 SW3.4 U2.4 | length 27.6
  Bottom Layer w1.1: U2.4 119.37,40.12 122.25,43 122.25,46 123.522,47.272 SW3.2 126.403,56.153 127.65,57.4 R20.2
IMAGEN_4: pad.0@122.25,51.25 R21.2 SW4.2 SW4.4 U2.5 | length 40
  Bottom Layer w1.1: U2.5 117.91,42.66 119.25,44 119.25,50 120.5,51.25 122.25,51.25 122.25,53.75 123,54.5 123,61 124.272,62.272 SW4.2 126.403,71.403 127.5,72.5 R21.2
LED: R30.1 U2.16 | length 20.5
  Bottom Layer w1.1: R30.1 96,75.5 103.75,67.75 103.75,64.25 105.02,62.98 U2.16
MCLR: C8.2 J3.1 R9.1 U2.1 | length 21.4
  Bottom Layer w1.1: U2.1 116.75,32.5 117.386,31.864 C8.2 118.85,27.9 120.1,26.65 J3.1 121.9,22.1 122.6,21.4 R9.1
NetC2_1: C2.1 L1.1 U1.3 | length 17.5
  Bottom Layer w1.5: U1.3 101.3,97.33 C2.1 110.75,95.5 112,94.25 L1.1
NetC3_2: C3.2 U2.9 X1.2 | length 28.3
  Bottom Layer w1.1: U2.9 118.82,52.82 120.25,54.25 120.25,68.75 121.8,70.3 C3.2
NetC4_2: C4.2 U2.10 X1.1 | length 24
  Bottom Layer w1.1: U2.10 117.36,55.36 118.25,56.25 118.25,68.75 116.8,70.2 C4.2
NetC5_1: C5.1 C6.2 U3.1 U4.1 | length 41.9
  Bottom Layer w1.1: U4.1 81.686,135.186 C6.2
  Bottom Layer w1.5: C6.2 85.15,137.6 86.75,136 86.75,132.25 88.6,130.4 99.85,130.4 103.75,126.5 108.5,126.5 109.8,127.8 U3.1
NetC9_2: C9.2 P1.2 | length 5.6
  Bottom Layer w1.1: C9.2 P1.2@17.5,126.06
  Bottom Layer w1.5: P1.2@17.54,126.06 P1.2
NetC10_2: C10.2 P2.2 | length 5.7
  Bottom Layer w1.1: C10.2@17.54,109.34 P2.2
NetC13_2: C13.2 U5.3 | length 10.7
  Bottom Layer w1.1: C13.2 22.3,131.7 24.08,129.92 U5.3
NetC14_2: C14.2 U6.3 | length 9.6
  Bottom Layer w1.1: U6.3 29.5,114.92 30,114.42 C14.2
NetC15_2: C15.2 P3.2 | length 5.6
  Bottom Layer w1.1: C15.2@17.54,85.64 P3.2
NetC16_2: C16.2 P4.2 | length 5.3
  Bottom Layer w1.1: C16.2@17.54,74.74 P4.2
NetC19_2: C19.2 U7.3 | length 10.8
  Bottom Layer w1.1: C19.2 22.2,96.8 24.08,94.92 U7.3
NetC20_2: C20.2 U8.3 | length 9.6
  Bottom Layer w1.1: U8.3 29.5,79.92 30,79.42 C20.2
NetC21_2: C21.2 P5.2 | length 5.6
  Bottom Layer w1.1: C21.2@17.54,50.64 P5.2
NetC22_2: C22.2 P6.2 | length 5.8
  Bottom Layer w1.1: C22.2@17.54,39.24 P6.2
NetC25_2: C25.2 U9.3 | length 10.6
  Bottom Layer w1.1: C25.2 22.3,61.7 24.08,59.92 U9.3
NetC26_2: C26.2 U10.3 | length 9.6
  Bottom Layer w1.1: U10.3 29.5,44.92 30,44.42 C26.2
NetC27_2: C27.2 P7.2 | length 5.5
  Bottom Layer w1.1: C27.2@17.54,15.64 P7.2
NetC28_2: C28.2 P8.2 | length 6
  Bottom Layer w1.1: C28.2@17.54,4.04 P8.2
NetC31_2: C31.2 U11.3 | length 10.7
  Bottom Layer w1.1: C31.2 22.3,26.7 24.08,24.92 U11.3
NetC32_2: C32.2 U12.3 | length 9.6
  Bottom Layer w1.1: U12.3 29.5,9.92 30,9.42 C32.2
NetD1_K: D1.K R3.1 | length 5
  Bottom Layer w1.2: R3.1 D1.K@58.3,127.48
NetD2_K: D2.K R4.1 | length 5
  Bottom Layer w1.2: R4.1@58.32,107.52 D2.K@58.32,112.5
NetD3_K: D3.K R7.1 | length 5.1
  Bottom Layer w1.2: R7.1@58.32,87.52 D3.K@58.32,92.6
NetD4_K: D4.K R8.1 | length 5
  Bottom Layer w1.2: R8.1@58.32,72.52 D4.K@58.32,77.5
NetD5_K: D5.K R13.1 | length 5
  Bottom Layer w1.2: R13.1@58.32,52.52 D5.K@58.32,57.5
NetD6_K: D6.K R14.1 | length 4.9
  Bottom Layer w1.2: R14.1@58.22,37.58 D6.K@58.22,42.5
NetD7_K: D7.K R18.1 | length 5
  Bottom Layer w1.2: R18.1@58.42,17.52 D7.K@58.42,22.5
NetD8_K: D8.K R19.1 | length 5
  Bottom Layer w1.2: R19.1@58.32,2.52 D8.K@58.32,7.5
NetD9_A: D9.A R30.2 | length 2.9
  Bottom Layer w1.1: R30.2 D9.A@94.1,80.7
NetJ1_1: J1.1 U3.4 | length 21.3
  Bottom Layer w1.5: U3.4 107.05,132.75 120.25,132.75 121.5,134 J1.1
NetJ1_2: J1.2 U3.2 | length 8.4
  Bottom Layer w1.5: U3.2 112,135.5 113.5,137 J1.2
NetP1_3: P1.3 U5.8 | length 23.9
  Bottom Layer w1.1: P1.3 22.25,126.1 23.35,125 28.5,125 30.25,126.75 30.25,134 31.25,135 U5.8
NetP2_3: P2.3 pad.6@25,122.5 pad.7@35,122.5 U6.8 | length 23.8
  Top Layer w0.5: pad.6@25,122.5 pad.7@35,122.5
  Bottom Layer w1.1: P2.3 20.08,120.83 21.75,122.5 pad.6@25,122.5
  Bottom Layer w1.4: U6.8 pad.7@35.12,122.38
NetP3_3: P3.3 U7.8 | length 24.1
  Bottom Layer w1.1: P3.3 25.05,91.2 26.25,90 29,90 30.5,91.5 30.5,99 31.5,100 U7.8
NetP4_3: P4.3 pad.4@25,87.5 pad.5@35,87.5 U8.8 | length 24
  Top Layer w0.5: pad.4@25,87.5 pad.5@35,87.5
  Bottom Layer w1.1: P4.3 20.08,86.08 21.5,87.5 pad.4@25,87.5
  Bottom Layer w1.4: U8.8 pad.5@35.12,87.38
NetP5_3: P5.3 U9.8 | length 23.9
  Bottom Layer w1.1: P5.3 24.55,56.2 25.75,55 29,55 30.5,56.5 30.5,63.75 31.75,65 U9.8
NetP6_3: P6.3 pad.2@35,52.5 pad.3@25,52.5 U10.8 | length 24
  Top Layer w0.5: pad.3@25,52.5 pad.2@35,52.5
  Bottom Layer w1.1: P6.3 20.08,51.08 21.5,52.5 pad.3@25,52.5
  Bottom Layer w1.4: U10.8 pad.2@35.12,52.38
NetP7_3: P7.3 U11.8 | length 23.7
  Bottom Layer w1.1: P7.3 24.9,21.1 26,20 29,20 30.5,21.5 30.5,28.5 32,30 U11.8
NetP8_3: P8.3 pad.0@35,17.5 pad.1@25,17.5 U12.8 | length 23.8
  Top Layer w0.5: pad.1@25,17.5 pad.0@35,17.5
  Bottom Layer w1.1: P8.3 20.08,15.83 21.75,17.5 pad.1@25,17.5
  Bottom Layer w1.4: U12.8 pad.0@35.12,17.38
NetQ1_2: Q1.2 R3.2 | length 2.4
  Bottom Layer w2: R3.2@53.197,122.523 Q1.2
NetQ2_2: Q2.2 R4.2 | length 2.4
  Bottom Layer w2: R4.2@53.197,107.523 Q2.2
NetQ3_2: Q3.2 R7.2 | length 2.4
  Bottom Layer w2: R7.2@53.197,87.523 Q3.2
NetQ4_2: Q4.2 R8.2 | length 2.4
  Bottom Layer w2: R8.2@53.197,72.523 Q4.2
NetQ5_2: Q5.2 R13.2 | length 2.4
  Bottom Layer w2: R13.2@53.197,52.523 Q5.2
NetQ6_2: Q6.2 R14.2 | length 2.4
  Bottom Layer w2: R14.2@53.197,37.523 Q6.2
NetQ7_2: Q7.2 R18.2 | length 2.5
  Bottom Layer w1.5: R18.2@53.25,17.5 R18.2@53.297,17.547
  Bottom Layer w2: R18.2@53.297,17.547 Q7.2
NetQ8_2: Q8.2 R19.2 | length 2.4
  Bottom Layer w2: R19.2@53.197,2.523 Q8.2
PGC: J3.5 U2.27 | length 17.6
  Bottom Layer w1.1: U2.27 105.29,35.04 104.5,34.25 104.5,29.5 109.94,24.06 J3.5
PGD: J3.4 U2.28 | length 12.5
  Bottom Layer w1.1: U2.28 107.38,29.87 112.48,24.77 J3.4
SV1: C14.1 R22.2 U5.6 | length 35.3
  Bottom Layer w1.1: C14.1 32.54,129.54 32.92,129.92 42.67,129.92 43.7,130.95 R22.2
SV2: C20.1 R24.2 U7.6 | length 35.4
  Bottom Layer w1.1: C20.1 32.54,94.54 32.92,94.92 43.17,94.92 43.75,95.5 R24.2@43.75,97.25
SV3: C26.1 R26.2 U9.6 | length 35.1
  Bottom Layer w1.1: C26.1 32.54,59.29 33.17,59.92 42.67,59.92 43.7,60.95 R26.2
SV4: C32.1 R28.2 U11.6 | length 35.6
  Bottom Layer w1.1: C32.1@32.54,2.4 32.54,24.29 33.17,24.92 43.17,24.92 43.9,25.65 R28.2
SW1: Q1.3 R1.1 U5.5 | length 16.2
  Bottom Layer w1.1: U5.5 Q1.3@51.324,127.38
SW2: Q3.3 R5.1 U7.5 | length 16.2
  Bottom Layer w1.1: U7.5 Q3.3@51.324,92.38
SW3: Q5.3 R10.1 U9.5 | length 16.2
  Bottom Layer w1.1: U9.5 Q5.3@51.324,57.38
SW4: Q7.3 R15.1 U11.5 | length 16.3
  Bottom Layer w1.1: U11.5 Q7.3@51.424,22.38
SW5: Q2.3 R2.1 U6.5 | length 16.2
  Bottom Layer w1.1: U6.5 Q2.3@51.324,112.38
SW6: Q4.3 R6.1 U8.5 | length 16.2
  Bottom Layer w1.1: U8.5 Q4.3@51.324,77.38
SW7: Q6.3 R11.1 U10.5 | length 16.2
  Bottom Layer w1.1: U10.5 Q6.3@51.324,42.38
SW8: Q8.3 R16.1 U12.5 | length 16.3
  Bottom Layer w1.1: U12.5 Q8.3@51.38,7.38
T_SW1: D1.A U2.17 | length 88.2
  Bottom Layer w1.1: D1.A 65.9,117.85 66.736,117.014 68.25,115.5 68.25,113.25 80.75,100.75 80.75,93.75 90.5,84 90.5,73.5 92.25,71.75 96.25,71.75 101.5,66.5 101.5,63.5 104.56,60.44 U2.17
T_SW2: D3.A pad.0@89.25,57.75 pad.21 U2.21 | length 70.6
  Top Layer w0.5: pad.0@89.25,57.75 pad.21
  Bottom Layer w1.1: D3.A 65.9,86.1 77.5,74.5 77.5,65.75 85.5,57.75 pad.0@89.25,57.75 ; pad.21 99.75,57.75 100.5,57 100.5,52.5 102.72,50.28 U2.21
T_SW3: D5.A pad.3@85.25,45.25 pad.19 U2.23 | length 46.8
  Top Layer w0.5: pad.3@85.25,45.25 pad.19
  Bottom Layer w1.1: D5.A 67.5,57.5 79.75,45.25 pad.3@85.25,45.25 ; pad.3@85.25,45.5 pad.3@85.5,45.5 ; pad.19 U2.23@107.33,45.25
T_SW4: D7.A pad.5@81.25,30 pad.16 U2.25 | length 55.3
  Top Layer w0.5: pad.5@81.25,30 pad.16
  Bottom Layer w1.1: D7.A 66,25.75 67.75,27.5 76.5,27.5 79,30 pad.5@81.25,30 ; pad.16 98,30 98.5,30.5 98.5,38.5 100.12,40.12 U2.25
T_SW5: D2.A U2.18 | length 75.9
  Bottom Layer w1.1: D2.A 66,112 73.993,104.007 78.5,99.5 78.5,92.25 88.25,82.5 88.25,72.5 91,69.75 94.25,69.75 99,65 99,62.5 103.6,57.9 U2.18
T_SW6: D4.A pad.1@89.25,55.25 pad.20 U2.22 | length 61
  Top Layer w0.5: pad.1@89.25,55.25 pad.20
  Bottom Layer w1.1: D4.A 70.25,77.5 75,72.75 75,64.5 76.598,62.902 84.25,55.25 pad.1@89.25,55.25 ; pad.20 98,51 101.26,47.74 U2.22
T_SW7: D6.A pad.2@85.25,42.5 pad.18 U2.24 | length 41.4
  Top Layer w0.5: pad.2@85.25,42.5 pad.18
  Bottom Layer w1.1: D6.A pad.2@85.25,42.5 ; pad.18 U2.24@107.22,42.5
T_SW8: D8.A pad.4@81.25,27.5 pad.15 U2.26 | length 65.8
  Top Layer w0.5: pad.4@81.25,27.5 pad.15
  Bottom Layer w1.1: D8.A 66,12.25 68.5,14.75 78,14.75 81.25,18 pad.4@81.25,27.5 ; pad.15 98.75,27.5 101,29.75 101,36 102.58,37.58 U2.26
VCC: C1.1 C7.2 C11.1 C12.1 C17.1 C18.1 C23.1 C24.1 C29.1 C30.1 pad.6@47.5,84.75 pad.7@58.25,84.75 pad.8 pad.9 pad.10 pad.11 pad.12 pad.13 pad.14 pad.17 pad.22 pad.23 pad.24 pad.25 R1.2 R2.2 R5.2 R6.2 R10.2 R11.2 R15.2 R16.2 U1.1 U4.3 U5.7 U6.7 U7.7 U8.7 U9.7 U10.7 U11.7 U12.7 | length 624.2
  Top Layer w0.5: pad.10 pad.11 ; pad.8 pad.9 ; pad.6@47.5,84.75 pad.7@58.25,84.75 ; pad.12 pad.13 ; pad.14 pad.17 ; pad.22 pad.23 ; pad.24 pad.25
  Bottom Layer w1.1: U12.7 C30.1 40,14.25 40.75,15 pad.10@47.5,15 ; U11.7 C29.1 40,29 41,30 75.464,30 78.714,33.25 pad.14 ; U10.7 C24.1 40,49 41,50 pad.8@47.5,50 ; U9.7 C23.1 40,64.5 40.5,65 60.25,65 62,63.25 62,50.75 60.75,49.5 pad.9 ; U8.7 C18.1 40,84.25 40.75,85 pad.6@47.5,85 ; U7.7 C17.1 40,99.5 40.5,100 63.5,100 69.25,94.25 69.25,87 80,76.25 80,66.75 86,60.75 pad.24 ; U6.7 C12.1 40,119.25 40.75,120 pad.12@47.5,120 ; U5.7 C11.1 40,134 41,135 62,135 ; pad.7@58.25,84.75 61.25,84.75 61.5,85 61.5,100 ; pad.13 62,119.5 ; pad.11 61,14.5 62.25,15.75 62.25,30 ; 62,60.75 67.75,60.75 80.25,48.25 pad.22 ; 62,119.75 62,119.5 ; pad.17 96,64.25 92.5,67.75 89.5,67.75 86.25,71 86.25,80.75 76.5,90.5 76.5,98 64,110.5 64,117.5 62,119.5
  Bottom Layer w1.2: R16.2 R15.2 ; R11.2 R10.2 ; R6.2 R5.2 ; R2.2 R1.2
  Bottom Layer w1.5: 62,119.75 62,135 64.6,137.6 C7.2 74.514,135.306 U4.3 ; 62,131 67,131 69.25,128.75 69.25,118.5 70.5,117.25 70.5,114.75 83.5,101.75 83.5,97.75 85.75,95.5 C1.1 94.1,97.45 U1.1
VIDEO_1: C13.1 J2.2 R32.1 | length 10.2
  Bottom Layer w1.1: J2.2 12.038,131.038 12.7,131.7 C13.1
VIDEO_2: C9.1 J4.2 R33.1 | length 10.2
  Bottom Layer w1.1: J4.2 11.712,121.038 12.25,120.5 C9.1
VIDEO_3: C10.1 J6.2 R34.1 | length 10.7
  Bottom Layer w1.1: J6.2 11.462,111.038 13.2,109.3 C10.1
VIDEO_4: C19.1 J8.2 R35.1 | length 10.3
  Bottom Layer w1.1: J8.2 12.5,96.038 13.262,96.8 C19.1
VIDEO_5: C15.1 J10.2 R36.1 | length 10.1
  Bottom Layer w1.1: J10.2 12.712,86.038 13.15,85.6 C15.1
VIDEO_6: C16.1 J12.2 R37.1 | length 10.3
  Bottom Layer w1.1: J12.2 11.462,76.038 13.1,74.4 C16.1
VIDEO_7: C25.1 J13.2 R38.1 | length 10.3
  Bottom Layer w1.1: J13.2 12.038,61.038 12.7,61.7 C25.1
VIDEO_8: C21.1 J14.2 R39.1 | length 10.1
  Bottom Layer w1.1: J14.2 11.962,51.038 12.4,50.6 C21.1
VIDEO_9: C22.1 J15.2 R40.1 | length 10.7
  Bottom Layer w1.1: J15.2 11.712,41.038 13.55,39.2 C22.1
VIDEO_10: C31.1 J16.2 R41.1 | length 10.2
  Bottom Layer w1.1: J16.2 11.788,26.038 12.45,26.7 C31.1
VIDEO_11: C27.1 J17.2 R42.1 | length 10.1
  Bottom Layer w1.1: J17.2 11.462,16.038 11.9,15.6 C27.1
VIDEO_12: C28.1 J18.2 R43.1 | length 10.8
  Bottom Layer w1.1: J18.2 11.25,6.038 13.288,4 C28.1
VIDEO_OUT_1: J5.2 R23.2 U6.6 | length 169
  Bottom Layer w1.1: U6.6 59.58,114.92 60.5,114 60.5,106.5 71.75,95.25 71.75,88 82.25,77.5 82.25,68 86.75,63.5 90.25,63.5 91.75,62 91.75,24.25 97,19 102.25,19 106.5,14.75 112.5,14.75 116.462,10.788 J5.2 ; 43.7,114.97 R23.2
VIDEO_OUT_2: J7.2 R25.2 U8.6 | length 129.4
  Bottom Layer w1.1: U8.6 60.08,79.92 61,79 61,74.25 63,72.25 68.25,72.25 70.25,70.25 70.25,62.25 81.5,51 86,51 87.75,49.25 87.75,21.5 94.5,14.75 100,14.75 103.962,10.788 J7.2 ; 43.7,79.97 R25.2
VIDEO_OUT_3: J9.2 R27.2 U10.6 | length 90.6
  Bottom Layer w1.1: U10.6 59.33,44.92 60.75,43.5 60.75,40.75 62.141,39.359 64,37.5 82.25,37.5 83.75,36 83.75,18.25 91.462,10.538 J9.2 ; 43.7,44.97 R27.2
VIDEO_OUT_4: J11.2 R29.2 U12.6 | length 75.7
  Bottom Layer w0.5: U12.6 49.42,9.92
  Bottom Layer w1.1: U12.6 59.83,9.92 61,8.75 61,3.25 62,2.25 69.25,2.25 71.5,4.5 71.5,8.25 72.25,9 78.5,9 78.962,8.538 J11.2 ; 43.7,9.97 R29.2
pads on no net: J3.6 U2.6 U2.7 U2.11 U2.12 U2.13 U2.14 U5.2 U5.4 U6.2 U6.4 U7.2 U7.4 U8.2 U8.4 U9.2 U9.4 U10.2 U10.4 U11.2 U11.4 U12.2 U12.4

## Polygon pours and split planes (outlines as drawn)
GND on Bottom Layer (solid, remove dead copper): 0,0 0,142.75 136.25,142.75 136.25,0

## Keep-outs
Keep-Out Layer:
  lines w0.254: 0,0 136.25,0 136.25,142.75 0,142.75 0,0

## Other copper
Bottom Layer:
  text "SWITCH VIDEO" at 133,115.25 h2

## Silkscreen, mask and mechanical layers (free items; w line width, h text height)
Top Overlay:
  lines w0.254: 25,17.5 35,17.5 ; 25,52.5 35,52.5 ; 25,87.5 35,87.5 ; 25,122.5 35,122.5 ; 47.5,14.5 58.5,14.5 ; 47.5,49.5 58.25,49.5 ; 47.5,84.75 58.25,84.75 ; 47.5,119.5 58.25,119.5 ; 81.25,27.5 96,27.5 ; 81.25,30 96,30 ; 81.25,33.25 96,33.25 ; 85.25,42.5 98,42.5 ; 85.25,45.25 98,45.25 ; 85.25,48.25 96,48.25 ; 89.25,55.25 98,55.25 ; 89.25,57.75 98,57.75 ; 89.25,60.75 96,60.75